# Altium PCB UZ_D_Incr_Encoder.PcbDoc (part 2 of 2)
Units mm, origin at the board's own origin, x right, y up, seen from the top; angles counter-clockwise.
Board outline 155.99 x 100 mm, 2 copper layers (Top Layer, Bottom Layer), stack 0.45 mm thick; 103 components, 109 nets, 501 pads, 172 vias.
Unrouted connection lines stored in the file: 15.
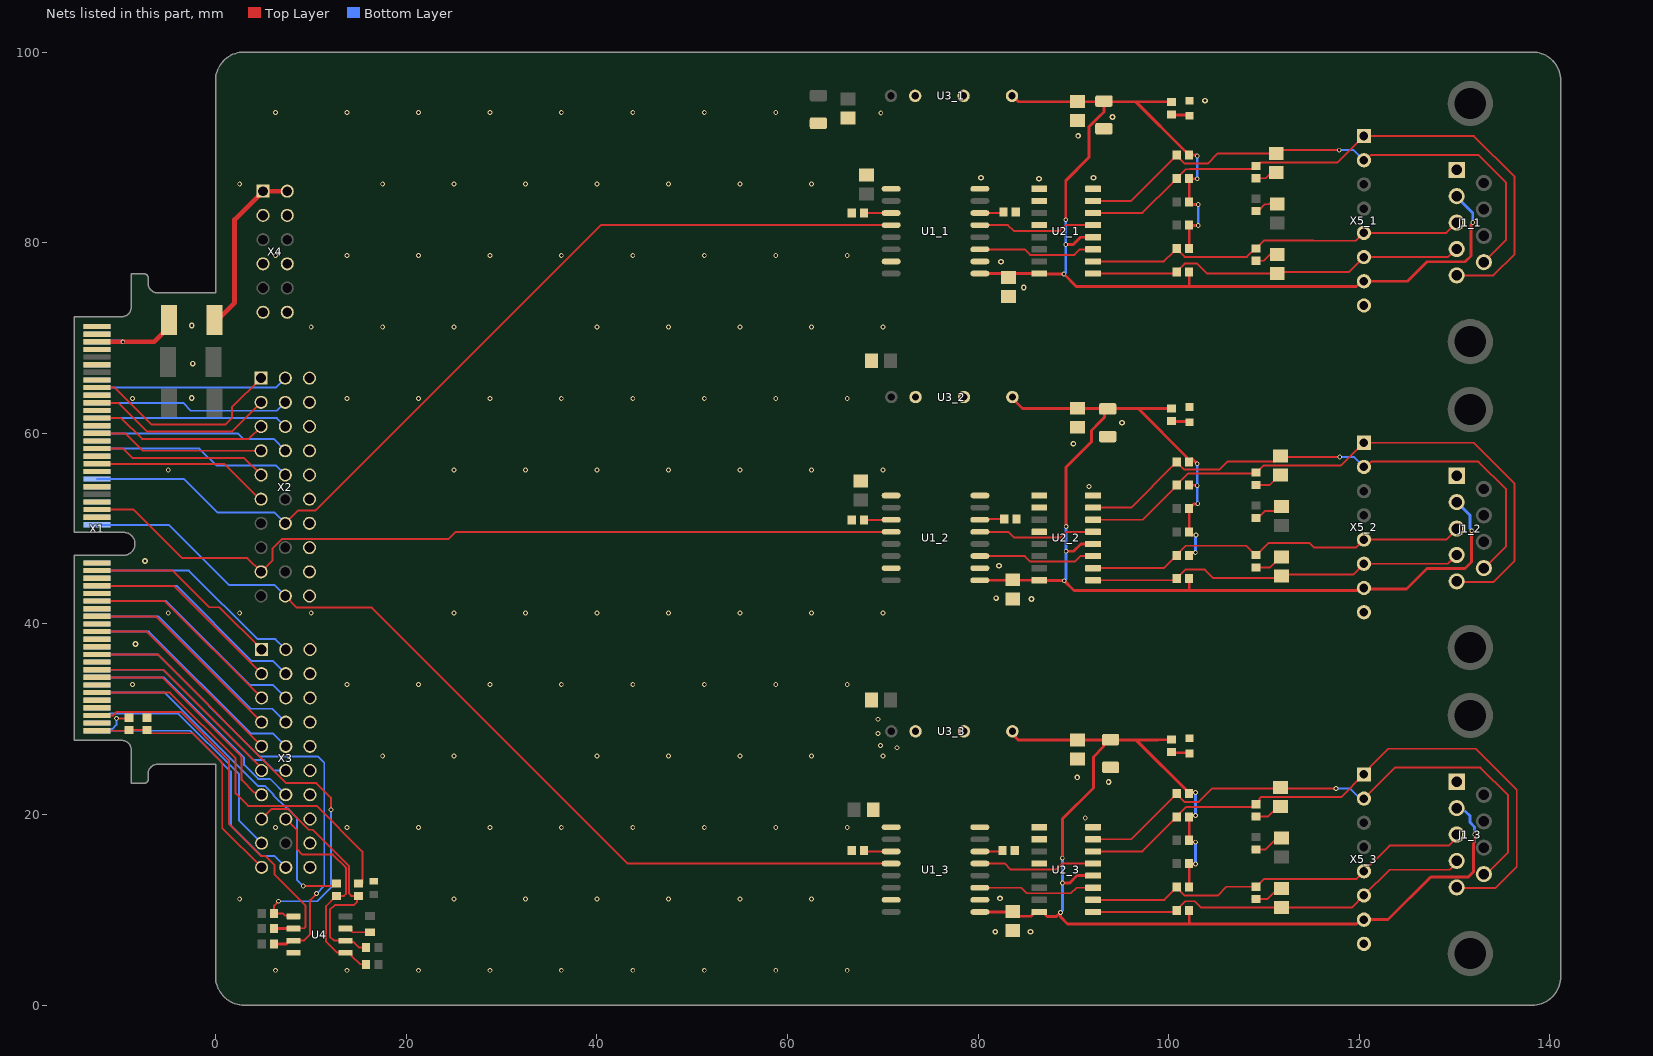
[diagram p2: the nets of this part, all layers, seen from the top]

## Via types
v1: diameter 0.5, hole 0.3, Top Layer to Bottom Layer, tented both sides, 149 vias
v2: diameter 0.6, hole 0.3, Top Layer to Bottom Layer, tented both sides, 23 vias

## Nets (pads, with @x,y where several pads share a name; then routed paths per layer and width w, separated by ;. In a path a pad name is that pad's centre, name@x,y a point inside that pad or via, vN(x,y) a via of type N, cw(c..) or ccw(c..) an arc to the next point about the centre after c; other vN are vias at no path point) (continued)
ADDR_0: R19.1 U4.1 X1.79 | length 49.9
  Top Layer w0.2: X1.79@-12.44,36.791 -6.064,36.791 7.427,23.3 10.572,23.3 12.1,21.772 v1(12.1,20.5) ; v1(6.6,10.9) 6.15,10.45 R19.1@6.15,9.629 7.066,9.629 7.321,9.374 U4.1@7.795,9.374 ; U4.1@7.795,9.305 U4.1@8.175,9.305
  Bottom Layer w0.2: v1(6.6,10.9) 10.666,10.9 12.1,12.334 v1(12.1,20.5)
ADDR_1: R18.1 U4.2 X1.95 | length 40.6
  Top Layer w0.2: X1.95@-12.44,30.391 -10.726,30.391 -10.342,30.775 -3.662,30.775 1.396,25.717 1.396,19.004 4.769,15.631 5.269,15.631 6.2,14.7 6.2,13.7 9.423,10.477 9.423,8.179 9.306,8.062 8.202,8.062 U4.2@8.175,8.035
  Top Layer w0.3: R18.1@6.15,8.029 6.156,8.035 U4.2@8.175,8.035
ADDR_2: R17.1 U4.3 X1.80 | length 51.3
  Top Layer w0.2: U4.3@8.175,6.765 9.265,6.765 9.915,7.415 9.915,11.015 v1(10.6,11.7)
  Top Layer w0.3: R17.1@6.15,6.429 7.414,6.429 7.75,6.765 U4.3@8.175,6.765
  Bottom Layer w0.2: X1.80@-12.44,36.791 -6.064,36.791 4.593,26.134 4.652,26.075 10.748,26.075 11.4,25.423 11.4,12.5 v1(10.6,11.7)
B+_1: J1_1.5 R3_1.1 R7_1.1 U2_1.6 X5_1.1 | length 64.9
  Top Layer w0.2: U2_1.6@91.665,83.109 97.23,83.109 100.475,86.353 100.525,86.353 100.85,86.678 R7_1.1@100.85,86.728 100.85,86.778 101.772,87.7 102.2,87.7 102.225,87.725 108.793,87.725 109.118,88.05 R3_1.1@109.158,88.05 109.168,88.05 109.493,88.375 109.625,88.375 109.65,88.4 117.661,88.4 120.447,91.186 X5_1.1@120.486,91.186 132.014,91.186 136.3,86.9 136.3,78.8 134.06,76.56 J1_1.5@130.22,76.56
B+_2: J1_2.5 R3_2.1 R7_2.1 U2_2.6 X5_2.1 | length 64.5
  Top Layer w0.2: U2_2.6@92.065,50.926 97.277,50.926 100.85,54.499 R7_2.1@100.85,54.549 100.85,54.599 102.035,55.784 109.071,55.784 R3_2.1@109.158,55.871 109.208,55.871 109.964,56.626 118.106,56.626 X5_2.1@120.486,59.007 132.014,59.007 136.3,54.721 136.3,46.621 134.06,44.381 J1_2.5@130.22,44.381
B+_3: J1_3.5 R3_3.1 R7_3.1 U2_3.6 X5_3.1 | length 66.8
  Top Layer w0.2: U2_3.6@91.304,16.13 97.23,16.13 100.475,19.374 100.525,19.374 100.85,19.699 R7_3.1@100.85,19.749 100.85,19.799 101.851,20.8 108.887,20.8 R3_3.1@109.158,21.071 109.183,21.071 109.508,21.396 109.508,21.645 109.683,21.821 118.1,21.821 X5_3.1@120.486,24.207 ; X5_3.1@120.486,24.347 120.627,24.347 121.136,24.857 121.136,24.997 123.039,26.9 132.228,26.9 136.514,22.614 136.514,14.514 134.274,12.274 J1_3.5@130.434,12.274
B-_1: C6_1.2 J1_1.9 R4_1.1 U2_1.7 X5_1.2 | length 57.7
  Top Layer w0.2: U2_1.7@91.665,84.379 96.05,84.379 100.475,88.804 100.525,88.804 R4_1.1@100.85,89.129 ; R4_1.1@100.85,89.179 R4_1.1@100.85,89.129 ; C6_1.2@111.296,89.357 105.157,89.357 104.1,88.3 101.679,88.3 R4_1.1@100.85,89.129 ; C6_1.2@111.328,89.8 111.428,89.7 v1(117.9,89.7) ; X5_1.2@120.486,88.646 120.698,88.646 121.252,89.2 132.5,89.2 135.4,86.3 135.4,80.3 J1_1.9@133.052,77.952
  Bottom Layer w0.2: v1(117.9,89.7) 119.393,89.7 X5_1.2@120.447,88.646
B-_2: C6_2.2 J1_2.9 R4_2.1 U2_2.7 X5_2.2 | length 57.5
  Top Layer w0.2: U2_2.7@92.065,52.196 96.046,52.196 100.475,56.625 100.525,56.625 R4_2.1@100.85,56.95 ; v1(117.94,57.521) 111.85,57.521 C6_2.2@111.744,57.626 111.169,57.051 106.188,57.051 105.328,56.192 101.608,56.192 R4_2.1@100.85,56.95 ; X5_2.2@120.486,56.467 120.72,56.467 121.254,57 ; 121.252,57.021 132.5,57.021 135.4,54.121 135.4,48.121 J1_2.9@133.052,45.773 ; R4_2.1@100.85,56.95 R4_2.1@100.85,57 R4_2.1@100.85,56.95
  Bottom Layer w0.2: v1(117.94,57.521) 119.432,57.521 X5_2.2@120.486,56.467
B-_3: C6_3.2 J1_3.9 R4_3.1 U2_3.7 X5_3.2 | length 59.2
  Top Layer w0.2: U2_3.7@91.304,17.4 96.05,17.4 100.475,21.825 100.525,21.825 R4_3.1@100.85,22.15 ; R4_3.1@100.85,22.2 R4_3.1@100.85,22.15 ; v1(117.54,22.721) 104.521,22.721 103.1,21.3 101.7,21.3 R4_3.1@100.85,22.15 ; X5_3.2@120.505,21.667 X5_3.2@120.486,21.667 123.734,24.914 132.714,24.914 135.614,22.014 135.614,16.014 J1_3.9@133.266,13.666
  Bottom Layer w0.2: v1(117.54,22.721) 119.032,22.721 X5_3.2@120.086,21.667
B_encoder_1: U1_1.12 X1.42 X2.20 | length 98.2
  Top Layer w0.2: X2.20@7.315,50.546 8.669,51.9 10.5,51.9 40.435,81.835 U1_1.12@70.89,81.835
  Bottom Layer w0.2: X1.42@-12.44,55.191 -3.291,55.191 0.2,51.7 6.161,51.7 X2.20@7.315,50.546
B_encoder_2: U1_2.12 X1.49 X2.25 | length 88.5
  Top Layer w0.2: X1.49@-12.44,51.991 -8.591,51.991 -3.5,46.9 3.341,46.9 X2.25@4.775,45.466 5.974,46.665 5.974,47.916 6.949,48.891 24.43,48.891 25.195,49.656 U1_2.12@70.89,49.656
B_encoder_3: U1_3.12 X1.54 X2.29 | length 98
  Top Layer w0.2: X2.29@7.315,42.926 8.541,41.7 16.4,41.7 43.244,14.856 U1_3.12@70.89,14.856
  Bottom Layer w0.2: X1.54@-12.44,50.391 -4.891,50.391 1.4,44.1 6.141,44.1 X2.29@7.315,42.926
B_single_1: U1_1.5 U2_1.5 | length 11.9
  Top Layer w0.2: U1_1.5@80.239,81.839 83.135,81.839 83.75,81.223 88.584,81.223 89.2,81.839 U2_1.5@91.665,81.839
B_single_2: U1_2.5 U2_2.5 | length 11.9
  Top Layer w0.2: U1_2.5@80.278,49.66 83.174,49.66 83.79,49.044 88.624,49.044 89.24,49.66 U2_2.5@91.704,49.66
B_single_3: U1_3.5 U2_3.5 | length 11.9
  Top Layer w0.2: U1_3.5@79.878,14.86 82.774,14.86 83.39,14.244 88.224,14.244 88.84,14.86 U2_3.5@91.304,14.86
Collective_FLT: X1.96 X3.25 | length 25.8
  Bottom Layer w0.2: X1.96@-12.44,30.391 -11.315,30.391 -11.116,30.591 -3.891,30.591 2.445,24.255 2.445,19.373 X3.25@4.826,16.993
CPLD_DigIn_01: X1.83 X3.16 | length 21.8
  Top Layer w0.2: X1.83@-12.44,35.191 -5.491,35.191 4.826,24.874 X3.16@4.826,24.613
CPLD_DigIn_02: X1.85 X3.19 | length 23.8
  Top Layer w0.2: X1.85@-12.44,34.391 -5.611,34.391 2.669,26.111 ; 2.666,26.114 cw(c2.528,25.969) 2.669,26.111 ; X3.19@4.826,22.073 4.602,22.296 4.068,22.296 2.728,23.637 2.728,26.052 2.669,26.111
CPLD_DigOut_01: X1.84 X3.17 | length 24.2
  Bottom Layer w0.2: X1.84@-12.44,35.191 -5.491,35.191 4,25.7 5.061,25.7 6.148,24.613 X3.17@7.366,24.613
CPLD_DigOut_02: X1.86 X3.20 | length 25.4
  Bottom Layer w0.2: X1.86@-12.44,34.391 -5.422,34.391 2.991,25.977 2.991,25.196 4.459,23.728 5.711,23.728 X3.20@7.366,22.073
DIG_IO_00: X1.17 X2.01 | length 21.5
  Top Layer w0.2: X1.17@-12.44,64.791 -10.59,64.791 -6.699,60.9 1.032,60.9 1.723,61.591 1.723,62.734 X2.01@4.775,65.786
DIG_IO_01: X1.18 X2.02 | length 20.2
  Bottom Layer w0.2: X1.18@-12.44,64.791 6.32,64.791 X2.02@7.315,65.786
DIG_IO_02: X1.21 X2.04 | length 19.7
  Top Layer w0.2: X1.21@-12.44,63.191 -10.191,63.191 -7.2,60.2 1.729,60.2 X2.04@4.775,63.246
DIG_IO_03: X1.22 X2.05 | length 20.5
  Bottom Layer w0.2: X1.22@-12.44,63.191 -3.414,63.191 -2.584,62.361 6.43,62.361 X2.05@7.315,63.246
DIG_IO_04: X1.25 X2.07 | length 18.7
  Top Layer w0.2: X1.25@-12.44,61.591 -9.891,61.591 -7.7,59.4 3.469,59.4 X2.07@4.775,60.706
DIG_IO_05: X1.26 X2.08 | length 20.1
  Bottom Layer w0.2: X1.26@-12.44,61.591 6.43,61.591 X2.08@7.315,60.706
DIG_IO_06: X1.29 X2.10 | length 18
  Top Layer w0.2: X1.29@-12.44,59.991 -9.491,59.991 -7.666,58.166 X2.10@4.775,58.166
DIG_IO_07: X1.30 X2.11 | length 20.5
  Bottom Layer w0.2: X1.30@-12.44,59.991 2.309,59.991 2.9,59.4 6.081,59.4 X2.11@7.315,58.166
DIG_IO_08: X1.33 X2.13 | length 18.4
  Top Layer w0.2: X1.33@-12.44,58.391 -9.691,58.391 -8.7,57.4 3.001,57.4 X2.13@4.775,55.626
DIG_IO_09: X1.34 X2.14 | length 20.9
  Bottom Layer w0.2: X1.34@-12.44,58.391 -1.691,58.391 0.1,56.6 6.341,56.6 X2.14@7.315,55.626
DIG_IO_10: X1.37 X2.16 | length 18.7
  Top Layer w0.2: X1.37@-12.44,56.791 0.909,56.791 4.614,53.086 X2.16@4.775,53.086
DIG_IO_20: X1.57 X3.01 | length 20.7
  Top Layer w0.2: X1.57@-12.44,45.591 -4.515,45.591 -0.669,41.744 0.394,41.744 X3.01@4.826,37.313
DIG_IO_21: X1.58 X3.02 | length 23.2
  Bottom Layer w0.2: X1.58@-12.44,45.591 -2.791,45.591 4.4,38.4 6.279,38.4 X3.02@7.366,37.313
DIG_IO_22: X1.61 X3.04 | length 21.1
  Top Layer w0.2: X1.61@-12.44,43.991 -4.392,43.991 X3.04@4.826,34.773
DIG_IO_23: X1.62 X3.05 | length 23.6
  Bottom Layer w0.2: X1.62@-12.44,43.991 -4.091,43.991 3.8,36.1 6.039,36.1 X3.05@7.366,34.773
DIG_IO_24: X1.65 X3.07 | length 21.5
  Top Layer w0.2: X1.65@-12.44,42.391 -5.332,42.391 X3.07@4.826,32.233
DIG_IO_25: X1.66 X3.08 | length 24
  Bottom Layer w0.2: X1.66@-12.44,42.391 -5.191,42.391 3.6,33.6 5.999,33.6 X3.08@7.366,32.233
DIG_IO_26: X1.69 X3.10 | length 21.9
  Top Layer w0.2: X1.69@-12.44,40.791 -6.272,40.791 X3.10@4.826,29.693
DIG_IO_27: X1.70 X3.11 | length 24.4
  Bottom Layer w0.2: X1.70@-12.44,40.791 -5.991,40.791 3.7,31.1 5.959,31.1 X3.11@7.366,29.693
DIG_IO_28: X1.73 X3.13 | length 22.3
  Top Layer w0.2: X1.73@-12.44,39.191 -7.212,39.191 X3.13@4.826,27.153
DIG_IO_29: X1.74 X3.14 | length 24.8
  Bottom Layer w0.2: X1.74@-12.44,39.191 -6.991,39.191 3.7,28.5 6.019,28.5 X3.14@7.366,27.153
DIG_Res_00: X1.78
DIG_Res_03: X1.91
DIG_Res_04: X1.92
DIG_Res_05: X1.93
DIG_Res_06: X1.94
DIG_Res_08: X1.77
GND: C2_1.1 C2_2.1 C2_3.1 C8_1.1 C8_2.1 C8_3.1 C9.1 C10.2 R5.1 R14_1.2 R14_2.2 R14_3.2 U1_1.9 U1_1.15 U1_2.9 U1_2.15 U1_3.9 U1_3.15 U3_1.2 U3_2.2 U3_3.2 U4.4 X1.1 X1.2 X1.3 X1.4 X1.7 X1.8 X1.11 X1.12 X1.15 X1.16 X1.19 X1.20 X1.23 X1.24 X1.27 X1.28 X1.31 X1.32 X1.35 X1.36 X1.39 X1.40 X1.43 X1.44 X1.47 X1.48 X1.51 X1.52 X1.55 X1.56 X1.59 X1.60 X1.63 X1.64 X1.67 X1.68 X1.71 X1.72 X1.75 X1.76 X1.81 X1.82 X1.87 X1.88 X1.97 X1.98 X2.03 X2.06 X2.09 X2.12 X2.15 X2.18 X2.21 X2.24 X2.27 X2.30 X3.03 X3.06 X3.09 X3.12 X3.15 X3.18 X3.21 X3.24 X3.27 X3.30 X4.03 X4.04 X4.07 X4.08 X4.11 X4.12
  other v1: 6.279,3.647 13.779,3.647 21.279,3.647 28.779,3.647 36.279,3.647 43.779,3.647 51.279,3.647 58.779,3.647 66.279,3.647 2.529,11.147 25.029,11.147 32.529,11.147 40.029,11.147 47.529,11.147 55.029,11.147 62.529,11.147 6.279,18.647 13.779,18.647 21.279,18.647 28.779,18.647 36.279,18.647 43.779,18.647 51.279,18.647 58.779,18.647 66.279,18.647 17.529,26.147 25.029,26.147 40.029,26.147 47.529,26.147 55.029,26.147 62.529,26.147 70.029,26.147 71.5,27 69.752,27.232 69.5,28.5 69.5,30 -8.721,33.647 13.779,33.647 21.279,33.647 28.779,33.647 36.279,33.647 43.779,33.647 51.279,33.647 58.779,33.647 66.279,33.647 -4.971,41.147 2.529,41.147 10.029,41.147 25.029,41.147 32.529,41.147 40.029,41.147 47.529,41.147 55.029,41.147 62.529,41.147 70.029,41.147 -4.971,56.147 25.029,56.147 32.529,56.147 40.029,56.147 47.529,56.147 55.029,56.147 62.529,56.147 70.029,56.147 -8.721,63.647 13.779,63.647 21.279,63.647 28.779,63.647 36.279,63.647 43.779,63.647 51.279,63.647 58.779,63.647 66.279,63.647 10.029,71.147 17.529,71.147 25.029,71.147 40.029,71.147 47.529,71.147 55.029,71.147 62.529,71.147 70.029,71.147 6.279,78.647 13.779,78.647 21.279,78.647 28.779,78.647 36.279,78.647 43.779,78.647 51.279,78.647 58.779,78.647 66.279,78.647 2.529,86.147 17.529,86.147 25.029,86.147 32.529,86.147 40.029,86.147 47.529,86.147 55.029,86.147 62.529,86.147 69.8,93.6 6.279,93.647 13.779,93.647 21.279,93.647 28.779,93.647 36.279,93.647 43.779,93.647 51.279,93.647 58.779,93.647
  other v2: -8.4,37.9 -7.4,46.6 -2.5,63.7 -2.4,67.3 -2.5,71.3
GND_ENC_1: C1_1.1 C5_1.1 C7_1.1 D1_1.1 J1_1.1 R13_1.1 U1_1.2 U1_1.8 U2_1.8 U2_1.9 U2_1.10 U2_1.12 U3_1.4 X5_1.8
  other v2: 84.8,75.3 82.4,78 86.4,86.7 80.3,86.8 92.1,86.8 90.5,91.2 94.1,93.179 103.8,94.9
GND_ENC_2: C1_2.1 C5_2.1 C7_2.1 D1_2.1 J1_2.1 R13_2.1 U1_2.2 U1_2.8 U2_2.8 U2_2.9 U2_2.10 U2_2.12 U3_2.4 X5_2.8
  other v1: 91.64,54.421
  other v2: 85.6,42.6 81.9,42.7 82.2,46.1 90,58.9 95.1,61.1
GND_ENC_3: C1_3.1 C5_3.1 C7_3.1 D1_3.1 J1_3.1 R13_3.1 U1_3.2 U1_3.8 U2_3.8 U2_3.9 U2_3.10 U2_3.12 U3_3.4 X5_3.8
  other v1: 91.24,19.621
  other v2: 81.8,7.7 85.5,7.7 82.3,11.2 93.7,23.4 90.4,23.9
NetC3_1_1: C3_1.1 R1_1.2 | length 2.7
  Top Layer w0.2: R1_1.2@109.118,78.099 109.98,78.099 111.228,79.348 C3_1.1@111.328,79.348
NetC3_2_1: C3_2.1 R1_2.2 | length 3.1
  Top Layer w0.2: R1_2.2@109.158,45.92 110.638,45.92 111.744,47.026 C3_2.1@111.844,47.026
NetC3_3_1: C3_3.1 R1_3.2 | length 3
  Top Layer w0.2: R1_3.2@108.758,11.12 110.347,11.12 111.276,12.05 C3_3.1@111.376,12.05
NetC4_1_1: C4_1.1 R2_1.2 | length 2.2
  Top Layer w0.2: R2_1.2@109.322,83.301 109.372,83.301 110.095,84.025 110.482,84.025 C4_1.1@111.007,84.55
NetC4_2_1: C4_2.1 R2_2.2 | length 3
  Top Layer w0.2: R2_2.2@109.361,51.122 109.411,51.122 110.135,51.846 111.364,51.846 C4_2.1@111.844,52.326
NetC4_3_1: C4_3.1 R2_3.2 | length 3.7
  Top Layer w0.2: R2_3.2@108.758,16.322 R2_3.2@108.961,16.322 ; R2_3.2@109.416,16.34 108.979,16.34 R2_3.2@108.961,16.322 ; C4_3.1@111.476,17.55 111.376,17.55 110.149,16.322 R2_3.2@108.961,16.322
NetC6_1_1: C6_1.1 R3_1.2 | length 2.6
  Top Layer w0.2: R3_1.2@109.118,86.75 110.178,86.75 111.228,87.8 C6_1.1@111.328,87.8
NetC6_2_1: C6_2.1 R3_2.2 | length 3
  Top Layer w0.2: R3_2.2@109.158,54.571 110.589,54.571 111.644,55.626 C6_2.1@111.744,55.626
NetC6_3_1: C6_3.1 R3_3.2 | length 3.4
  Top Layer w0.2: R3_3.2@108.758,19.771 110.392,19.771 111.545,20.925 C6_3.1@111.645,20.925
NetD1_1_2: D1_1.2 R12_1.1 | length 1.9
  Top Layer w0.3: R12_1.1@100.3,93.45 100.375,93.375 102.103,93.375 D1_1.2@102.178,93.3
NetD1_2_2: D1_2.2 R12_2.1 | length 1.9
  Top Layer w0.3: R12_2.1@100.3,61.3 100.375,61.225 102.103,61.225 D1_2.2@102.178,61.15
NetD1_3_2: D1_3.2 R12_3.1 | length 1.9
  Top Layer w0.3: R12_3.1@100.3,26.55 100.375,26.475 102.103,26.475 D1_3.2@102.178,26.4
NetR13_1_2: R13_1.2 U1_1.6 | length 2.6
  Top Layer w0.2: U1_1.6@80.19,83.105 R13_1.2@82.655,83.105
  Top Layer w0.3: R13_1.2@82.655,83.105 R13_1.2@82.75,83.2
NetR13_2_2: R13_2.2 U1_2.6 | length 2.6
  Top Layer w0.2: U1_2.6@80.19,50.926 80.917,50.926 80.991,51 R13_2.2@82.75,51
NetR13_3_2: R13_3.2 U1_3.6 | length 2.4
  Top Layer w0.2: U1_3.6@80.19,16.126 82.476,16.126 R13_3.2@82.55,16.2
NetR14_1_1: R14_1.1 U1_1.11 | length 2.8
  Top Layer w0.2: R14_1.1@68.055,83.105 U1_1.11@70.89,83.105
  Top Layer w0.3: R14_1.1@68.05,83.1 R14_1.1@68.055,83.105
NetR14_2_1: R14_2.1 U1_2.11 | length 2.9
  Top Layer w0.2: R14_2.1@68.05,50.9 68.063,50.913 70.877,50.913 U1_2.11@70.89,50.926
NetR14_3_1: R14_3.1 U1_3.11 | length 2.9
  Top Layer w0.2: R14_3.1@68.05,16.2 68.124,16.126 U1_3.11@70.89,16.126
NetR15_2: R15.2 X1.89 | length 40.3
  Top Layer w0.2: X1.89@-12.44,32.791 -4.791,32.791 2.1,25.9 2.1,22.219 3.419,20.9 10.6,20.9 15.4,16.1 R15.2@15.4,12.75
NetR16_1: R16.1 X1.90 | length 37.5
  Top Layer w0.2: v1@9.206,12.496 12.446,12.496 R16.1@12.7,12.75
  Bottom Layer w0.2: X1.90@-12.44,32.791 -5.357,32.791 4.426,23.008 5.185,23.008 6.068,22.125 6.068,22.02 7.453,20.635 7.558,20.635 8.565,19.628 8.565,13.124 v1(9.193,12.496)
NetSB1_2: SB1.2 U4.7 | length 2.8
  Top Layer w0.2: U4.7@13.625,8.035 14.05,8.035 14.25,7.835 14.25,7.76 14.367,7.643 SB1.2@16.2,7.643
PILOT_IN: R6.2 X1.100 X3.29 | length 33.3
  Top Layer w0.2: v1(-10.391,30.091) -9.16,30.091 R6.2@-9.1,30.15
  Bottom Layer w0.2: v1(-10.391,30.091) -10.4,30.081 -10.4,29.4 -10.834,28.966 -12.265,28.966 X1.100@-12.44,28.791 -2.668,28.791 0.6,25.523 0.6,25.499 1.6,24.499 1.6,18.896 4.865,15.631 6.187,15.631 X3.29@7.366,14.453
PILOT_OUT: R5.2 R6.1 X1.99 X3.28 | length 27.3
  Top Layer w0.2: X1.99@-12.44,28.791 -9.159,28.791 R6.1@-9.1,28.85 R5.2@-7.2,28.85 -6.875,28.525 -2.402,28.525 0.7,25.423 0.7,18.579 X3.28@4.826,14.453
PS_I2C0_SCL: R15.1 R21.1 U4.6 X3.22 | length 27
  Top Layer w0.2: X3.22@4.826,19.533 5.855,20.562 7.625,20.562 9.787,18.4 10.174,18.4 14,14.574 14,11.683 14.225,11.458 R15.1@14.981,11.458 ; R15.1@14.981,11.45 14.842,11.311 14.842,10.85 14.492,10.5 12.503,10.5 12,9.997 12,7.193 12.428,6.765 U4.6@13.625,6.765 13.78,6.61 14.49,6.61 15.075,6.025 R21.1@15.775,6.025
PS_I2C0_SDA: R16.2 R20.1 U4.5 X3.23 | length 24
  Top Layer w0.2: X3.23@7.366,19.533 8.565,18.334 8.565,16.335 9.1,15.8 12.3,15.8 13.65,14.45 13.7,14.45 13.7,11.696 13.454,11.45 12.65,11.45 11.6,10.4 11.6,6.654 12.717,5.537 13.583,5.537 U4.5@13.625,5.495 14.05,5.495 14.25,5.295 14.25,5.204 15.167,4.287 15.767,4.287 R20.1@15.775,4.279
VCC_ENC_1: C1_1.2 C5_1.2 C7_1.2 J1_1.2 R4_1.2 R7_1.2 R8_1.2 R9_1.2 R10_1.2 R11_1.2 R12_1.2 U1_1.1 U2_1.4 U2_1.16 U3_1.6 X5_1.7 | length 123
  Top Layer w0.3: U1_1.1@80.15,76.755 86.75,76.755 86.786,76.719 88.981,76.719 v1(89,76.7) 90.3,75.4 102.092,75.4 ; U3_1.6@83.56,95.4 83.615,95.4 84.237,94.778 90.444,94.778 C5_1.2@93.2,94.778 ; v1(89.2,79.8) 89.985,79.8 90.75,80.565 U2_1.4@91.65,80.565 ; v1(89.2,82.4) 89.2,86.5 91.65,88.95 91.65,92.152 92.598,93.1 92.6,93.1 93.2,93.7 C5_1.2@93.2,94.778 ; R12_1.2@100.3,94.75 100.272,94.778 96.551,94.778 ; R11_1.2@102.15,76.925 102.15,75.458 102.092,75.4 ; R10_1.2@102.15,79.376 R9_1.2@102.15,81.827 102.177,81.8 v1(103.1,81.8) ; v1(103,86.7) 102.178,86.7 R7_1.2@102.15,86.728 R8_1.2@102.15,84.277 102.15,84.275 102.425,84 v1(103.1,84) ; v1(103,89.1) 102.921,89.179 R4_1.2@102.15,89.179 102.15,89.229 101.875,89.504 101.825,89.504 96.551,94.778 ; v1(131.9,82.1) 131.9,82.046 131.7,81.846 131.7,78.6 131.1,78 127.1,78 125.046,75.946 X5_1.7@120.486,75.946 120.257,75.946 119.711,75.4 102.092,75.4 ; C5_1.2@93.2,94.778 C5_1.2@93.2,94.85 93.272,94.778 96.551,94.778
  Bottom Layer w0.3: v1(89,76.7) 89.2,76.9 v1(89.2,79.8) v1(89.2,82.4) ; v1(103,86.7) v1(103,89.1) ; v1(103.1,81.8) v1(103.1,84) ; J1_1.2@130.22,84.87 130.22,84.774 131.9,83.094 v1(131.9,82.1)
VCC_ENC_2: C1_2.2 C5_2.2 C7_2.2 J1_2.2 R4_2.2 R7_2.2 R8_2.2 R9_2.2 R10_2.2 R11_2.2 R12_2.2 U1_2.1 U2_2.4 U2_2.16 U3_2.6 X5_2.7 | length 122.5
  Top Layer w0.3: U1_2.1@80.19,44.576 83.594,44.576 C1_2.2@83.644,44.626 83.695,44.576 U2_2.16@86.415,44.576 86.79,44.576 86.825,44.54 89.02,44.54 v1(89.04,44.521) 90.06,43.5 102.158,43.5 102.15,43.508 R11_2.2@102.15,44.746 ; U3_2.6@83.725,63.529 84.654,62.599 C5_2.2@93.771,62.599 ; v1(89.24,47.621) 90.025,47.621 90.79,48.386 U2_2.4@91.69,48.386 ; v1(89.24,50.221) 89.24,56.44 91.9,59.1 91.9,60.3 92.8,61.2 93.271,61.671 93.271,62.099 C5_2.2@93.771,62.599 ; R12_2.2@100.3,62.6 100.299,62.599 96.801,62.599 ; 102.15,43.513 119.711,43.513 119.735,43.537 120.257,43.537 X5_2.7@120.486,43.767 ; R10_2.2@102.15,47.197 102.15,47.225 102.425,47.5 v1(102.797,47.5) ; R7_2.2@102.15,54.549 102.924,54.549 102.973,54.5 v1(103,54.5) ; R4_2.2@102.15,57 101.875,57.275 101.875,57.525 96.801,62.599 ; R4_2.2@102.45,57.35 v1(103,56.8) ; v1(102.878,49.322) 102.425,49.322 102.15,49.597 R9_2.2@102.15,49.647 R8_2.2@102.15,52.098 102.15,52.148 102.425,52.423 102.475,52.423 102.647,52.595 103.027,52.595 v1(103.046,52.615) ; X5_2.7@120.486,43.655 124.934,43.655 127.1,45.821 131.1,45.821 131.779,46.5 v1@131.779,49.767 ; C5_2.2@93.771,62.599 94.223,62.599 96.801,62.599
  Bottom Layer w0.3: v1(89.04,44.521) 89.24,44.721 v1(89.24,47.621) v1(89.24,50.221) ; v1(102.797,47.5) 102.797,49.215 102.878,49.295 v1(102.878,49.322) ; v1(103,56.8) v1(103,54.5) 103,52.661 v1(103.046,52.615) ; J1_2.2@129.918,53.072 131.6,51.39 131.6,50.021 131.8,49.821 v1(131.8,49.767)
VCC_ENC_3: C1_3.2 C5_3.2 C7_3.2 J1_3.2 R4_3.2 R7_3.2 R8_3.2 R9_3.2 R10_3.2 R11_3.2 R12_3.2 U1_3.1 U2_3.4 U2_3.16 U3_3.6 X5_3.7 | length 124.6
  Top Layer w0.3: U1_3.1@79.79,9.776 C1_3.2@83.644,9.776 ; U3_3.6@83.325,28.729 84.254,27.799 C5_3.2@93.571,27.799 ; C1_3.2@83.644,9.826 84.143,9.328 85.564,9.328 85.74,9.503 85.74,9.601 85.915,9.776 86.915,9.776 87.09,9.601 87.09,9.468 87.265,9.292 88.211,9.292 v1(88.64,9.721) 88.64,9.273 89.394,8.519 102.27,8.519 ; v1(88.84,12.821) 89.625,12.821 90.39,13.586 U2_3.4@91.29,13.586 ; v1(88.84,15.421) 88.84,19.521 92.1,22.781 92.1,26.05 93.171,27.121 93.171,27.399 C5_3.2@93.571,27.799 ; C5_3.2@93.9,27.85 93.622,27.85 C5_3.2@93.571,27.799 ; C5_3.2@94.223,27.799 96.601,27.799 ; R12_3.2@100.3,27.85 98.879,27.85 98.828,27.799 96.601,27.799 ; R11_3.2@102.15,9.946 102.15,8.639 102.27,8.519 ; R10_3.2@102.15,12.397 R9_3.2@102.15,14.847 102.197,14.8 v1(102.8,14.8) ; v1(102.8,17.1) 102.348,17.1 R8_3.2@102.15,17.298 R7_3.2@102.15,19.749 102.301,19.9 v1(102.8,19.9) ; v1(102.8,22.3) 102.25,22.3 R4_3.2@102.15,22.2 102.15,22.25 96.601,27.799 ; v1@132.114,17.886 132.114,17.117 131.965,16.969 131.965,13.996 131.424,13.455 127.503,13.455 123.014,8.967 120.162,8.967 119.714,8.519 102.27,8.519
  Bottom Layer w0.3: v1(88.64,9.721) 88.84,9.921 v1(88.84,12.821) v1(88.84,15.421) ; v1(102.8,14.8) v1(102.8,17.1) ; v1(102.8,19.9) v1(102.8,22.3) ; 131.156,20.325 131.609,19.872 131.609,19.187 132.1,18.696 v1(132.1,17.9)
VIN: F1.1 X1.5 X1.6 | length 11.7
  Top Layer w0.5: X1.5@-12.44,69.591 v1(-9.727,69.591) -6.44,69.591 -4.879,71.152 F1.1@-4.879,71.882
  Bottom Layer w0.5: X1.6@-12.44,69.591 v1(-9.727,69.591)
VIN_fused: F1.2 X4.01 X4.02 | length 19.2
  Top Layer w0.5: F1.2@-0.099,70.882 -0.099,71.612 2,73.711 2,82.416 X4.01@4.978,85.395 X4.02@7.518,85.395
Z+_1: J1_1.3 R1_1.1 R10_1.1 U2_1.2 X5_1.5 | length 41
  Top Layer w0.2: U2_1.2@91.665,78.029 99.503,78.029 100.475,79.001 100.525,79.001 R10_1.1@100.85,79.326 ; R10_1.1@100.85,79.376 R10_1.1@100.85,79.326 ; J1_1.3@130.22,82.1 129.146,81.026 X5_1.5@120.486,81.026 120.447,81.026 119.621,80.2 115.2,80.2 115.177,80.223 109.992,80.223 109.168,79.399 R1_1.1@109.158,79.399 109.108,79.399 108.209,78.5 101.676,78.5 R10_1.1@100.85,79.326
Z+_2: J1_2.3 R1_2.1 R10_2.1 U2_2.2 X5_2.5 | length 41.1
  Top Layer w0.2: U2_2.2@92.065,45.846 99.499,45.846 100.475,46.822 100.525,46.822 100.85,47.147 R10_2.1@100.85,47.197 100.85,47.247 101.803,48.2 108.128,48.2 109.108,47.22 R1_2.1@109.158,47.22 109.208,47.22 110.488,48.5 114.76,48.5 115.24,48.021 119.66,48.021 X5_2.5@120.486,48.847 129.146,48.847 J1_2.3@130.22,49.921
Z+_3: J1_3.3 R1_3.1 R10_3.1 U2_3.2 X5_3.5 | length 41.9
  Top Layer w0.2: U2_3.2@92.065,11.046 99.549,11.046 R10_3.1@100.85,12.347 ; R10_3.1@100.85,12.397 R10_3.1@100.85,12.347 ; J1_3.3@130.434,17.814 129.36,16.74 123.18,16.74 X5_3.5@120.486,14.047 119.66,13.221 109.983,13.221 109.533,12.771 109.533,12.745 109.208,12.42 R1_3.1@109.158,12.42 106.052,12.42 105.131,11.5 101.697,11.5 R10_3.1@100.85,12.347
Z-_1: C3_1.2 J1_1.4 R11_1.1 U2_1.1 X5_1.6 | length 40.5
  Top Layer w0.2: U2_1.1@91.665,76.759 100.684,76.759 R11_1.1@100.85,76.925 100.85,76.975 101.675,77.8 103,77.8 104.043,76.757 C3_1.2@111.396,76.757 111.539,76.9 118.9,76.9 X5_1.6@120.486,78.486 129.271,78.486 130.115,79.33 J1_1.4@130.22,79.33
Z-_2: C3_2.2 J1_2.4 R11_2.1 U2_2.1 X5_2.6 | length 40.6
  Top Layer w0.2: U2_2.1@91.704,44.58 U2_2.1@92.065,44.58 ; U2_2.1@92.065,44.576 100.68,44.576 R11_2.1@100.85,44.746 100.85,44.796 101.754,45.7 103.8,45.7 104.7,44.8 111.618,44.8 C3_2.2@111.844,45.026 111.987,45.169 119.348,45.169 X5_2.6@120.486,46.307 ; X5_2.6@120.656,46.476 X5_2.6@120.486,46.307 ; J1_2.4@130.22,47.151 130.115,47.151 129.271,46.307 X5_2.6@120.486,46.307
Z-_3: C3_3.2 J1_3.4 R11_3.1 U2_3.1 X5_3.6 | length 41.9
  Top Layer w0.2: U2_3.1@91.304,9.78 100.684,9.78 R11_3.1@100.85,9.946 100.85,9.996 101.755,10.901 102.759,10.901 103.434,10.226 C3_3.2@111.844,10.226 119.206,10.226 X5_3.6@120.486,11.507 123.18,14.2 129.485,14.2 130.329,15.044 J1_3.4@130.434,15.044
Z_single_1: U1_1.3 U2_1.3 | length 11.9
  Top Layer w0.2: U1_1.3@80.239,79.299 84.874,79.299 85.458,78.715 90.107,78.715 90.691,79.299 U2_1.3@91.665,79.299
Z_single_2: U1_2.3 U2_2.3 | length 11.9
  Top Layer w0.2: U1_2.3@80.278,47.12 84.914,47.12 85.498,46.535 90.147,46.535 90.731,47.12 U2_2.3@91.704,47.12
Z_single_3: U1_3.3 U2_3.3 | length 11.9
  Top Layer w0.2: U1_3.3@79.878,12.32 84.514,12.32 85.098,11.735 89.747,11.735 90.331,12.32 U2_3.3@91.304,12.32
pads on no net: J1_1.6 J1_1.10 J1_1.11 J1_2.6 J1_2.10 J1_2.11 J1_3.6 J1_3.10 J1_3.11 U1_1.7 U1_2.7 U1_3.7 U2_1.11 U2_2.11 U2_3.11 X3.26

## Polygon pours and split planes (outlines as drawn)
GND on Top Layer "GND_L01_P000" (solid, remove dead copper, pour order 0): 3,100 72.1,100 72.1,0.127 2.286,0.127 0,2.413 0,25.275 -6.526,25.275 -7.073,24.728 -7.073,23.679 -7.06,23.666 -7.46,23.266 -8.831,23.266 -8.853,23.288 -8.853,27.168 -9.451,27.766 -14.831,27.766 -14.84,27.775 -14.84,47.191 -9.095,47.191 -8.407,47.879 -8.407,48.827 -9.181,49.6 -11.841,49.6 -11.85,49.591 -11.859,49.6 -14.84,49.6 -14.84,72.225 -14.827,72.238 -9.861,72.238 -9.849,72.225 -9.411,72.225 -8.84,72.796 -8.84,76.712 -8.777,76.649 -7.238,76.649 -7.238,75.89 -6.635,75.287 -6.635,74.898 -4.946,74.898 -4.773,74.725 -0.02,74.725 -0.02,98.177 1.804,100
GND on Top Layer "GND_L01_P011" (solid, pour order 11): 69.302,65.532 74.202,65.532 74.202,62.032 69.302,62.032
GND on Top Layer "GND_L01_P013" (solid, pour order 13): 69.302,97.704 74.202,97.704 74.202,94.204 69.302,94.204
GND_ENC_1 on Top Layer "GND_ENC_1_TOP" (solid, remove dead copper, pour order 8): 77.5,97.063 77.5,71.5 139.659,71.5 139.659,97.001
GND on Top Layer "GND_L01_P014" (solid, pour order 14): 69.302,30.504 74.202,30.504 74.202,27.004 69.302,27.004
GND_ENC_3 on Top Layer "GND_ENC_3_TOP" (solid, remove dead copper, pour order 4): 77.5,30 77.5,4.5 139.659,4.5 139.659,30
GND_ENC_2 on Top Layer "GND_ENC_2_TOP" (solid, remove dead copper, pour order 3): 77.5,65 77.5,39.5 139.659,39.5 139.659,65
GND on Bottom Layer "GND_L02_P017" (solid, pour order 17): 69.276,97.646 74.176,97.646 74.176,94.146 69.276,94.146
GND on Bottom Layer "GND_L02_P016" (solid, pour order 16): 69.302,65.532 74.202,65.532 74.202,62.032 69.302,62.032
GND on Bottom Layer "GND_L02_P006" (solid, remove dead copper, pour order 6): 2.822,100.152 72.108,100.152 72.083,0.279 2.108,0.279 -0.178,2.565 -0.178,25.427 -6.704,25.427 -7.251,24.88 -7.251,23.831 -7.238,23.818 -7.638,23.418 -9.009,23.418 -9.031,23.44 -9.031,27.321 -9.628,27.918 -15.009,27.918 -15.018,27.927 -15.018,47.343 -9.273,47.343 -8.585,48.031 -8.585,48.979 -9.359,49.752 -12.019,49.752 -12.028,49.743 -12.037,49.752 -15.018,49.752 -15.018,72.377 -15.005,72.39 -10.039,72.39 -10.027,72.377 -9.588,72.377 -9.018,72.948 -9.018,76.864 -8.955,76.801 -7.416,76.801 -7.416,76.043 -6.813,75.439 -6.813,75.05 -5.124,75.05 -4.951,74.877 -0.198,74.877 -0.198,98.329 1.626,100.152
GND on Bottom Layer "GND_L02_P015" (solid, pour order 15): 69.333,30.42 74.233,30.42 74.233,26.92 69.333,26.92
GND_ENC_1 on Bottom Layer "GND_ENC_1_TOP" (solid, remove dead copper, pour order 12): 77.5,97.063 77.5,71.5 139.659,71.5 139.659,97.001
GND_ENC_2 on Bottom Layer "GND_ENC_2_BOTTOM" (solid, remove dead copper, pour order 9): 77.5,65 77.5,39.5 139.576,39.5 139.576,65
GND_ENC_3 on Bottom Layer "GND_ENC_3_BOTTOM" (solid, remove dead copper, pour order 7): 77.5,30 77.5,4.5 139.576,4.5 139.576,30

## Keep-outs
Keep-Out Layer:
  rectangle: 0,97.1 142,100.1
  rectangle: 0,0 142,3

## Silkscreen, mask and mechanical layers (free items; w line width, h text height)
Top Overlay:
  text "B+" at 122.754,90.636 h1.1
  text "B-" at 122.754,88.096 h1.1
  text "A+" at 122.754,85.556 h1.1
  text "VIN" at 9.164,84.642 h1.1
  text "A-" at 122.754,83.016 h1.1
  text "GND" at 9.167,82.102 h1.1
  text "Z+" at 122.754,80.476 h1.1
  text "5V_PER" at 9.167,79.862 h1.1
  text "Z-" at 122.754,77.936 h1.1
  text "GND" at 9.167,77.022 h1.1
  text "5V" at 122.754,75.396 h1.1
  text "3V3_PER" at 9.167,74.882 h1.1
  text "GND" at 122.754,72.856 h1.1
  text "GND" at 9.167,72.069 h1.1
  text "GND" at 19,65.492 h1.52
  text "D00" at 11.6,65.316 h1.52
  text "D01" at 15.5,65.316 h1.52
  text "GND" at 19,62.906 h1.52
  text "D02" at 11.6,62.746 h1.52
  text "D03" at 15.5,62.745 h1.52
  text "GND" at 19,60.32 h1.52
  text "D04" at 11.6,60.175 h1.52
  text "D05" at 15.5,60.175 h1.52
  text "B+" at 122.794,58.457 h1.1
  text "GND" at 19,57.733 h1.52
  text "D06" at 11.6,57.605 h1.52
  text "D07" at 15.5,57.605 h1.52
  text "B-" at 122.794,55.917 h1.1
  text "GND" at 19,55.147 h1.52
  text "D08" at 11.6,55.035 h1.52
  text "D09" at 15.5,55.035 h1.52
  text "A+" at 122.794,53.377 h1.1
  text "GND" at 19,52.561 h1.52
  text "D11" at 15.5,52.481 h1.52
  text "D10" at 11.6,52.465 h1.52
  text "A-" at 122.794,50.837 h1.1
  text "GND" at 19,49.975 h1.52
  text "D12" at 11.6,49.911 h1.52
  text "D13" at 15.5,49.91 h1.52
  text "Z+" at 122.794,48.297 h1.1
  text "GND" at 19,47.388 h1.52
  text "D14" at 11.6,47.356 h1.52
  text "D15" at 15.5,47.34 h1.52
  text "Z-" at 122.794,45.757 h1.1
  text "D16" at 11.6,44.786 h1.52
  text "D17" at 15.5,44.786 h1.52
  text "GND" at 19,44.802 h1.52
  text "5V" at 122.794,43.217 h1.1
  text "D18" at 11.6,42.216 h1.52
  text "D19" at 15.5,42.216 h1.52
  text "GND" at 19,42.216 h1.52
  text "GND" at 122.794,40.677 h1.1
  text "D20" at 11.6,37.012 h1.52
  text "D21" at 15.6,36.996 h1.52
  text "GND" at 19,36.982 h1.52
  text "D22" at 11.6,34.421 h1.52
  text "D23" at 15.6,34.396 h1.52
  text "GND" at 19,34.391 h1.52
  text "D24" at 11.6,31.83 h1.52
  text "D25" at 15.6,31.798 h1.52
  text "GND" at 19,31.799 h1.52
  text "D26" at 11.6,29.223 h1.52
  text "D27" at 15.6,29.215 h1.52
  text "GND" at 19,29.207 h1.52
  text "D28" at 11.6,26.616 h1.52
  text "D29" at 15.6,26.616 h1.52
  text "GND" at 19,26.616 h1.52
  text "CPLD_IN01" at 11.6,24.234 h1.52
  text "OUT01" at 20.4,24.234 h1.52
  text "GND" at 25.9,24.234 h1.52
  text "B+" at 122.394,23.657 h1.1
  text "GND" at 26,21.668 h1.52
  text "CPLD_IN02" at 11.6,21.6 h1.52
  text "OUT02" at 20.4,21.6 h1.52
  text "B-" at 122.394,21.117 h1.1
  text "GND" at 26,19.102 h1.52
  text "I2C0_SCL" at 11.6,18.966 h1.52
  text "SCA" at 20.4,18.966 h1.52
  text "A+" at 122.394,18.577 h1.1
  text "FAULT" at 11.6,16.604 h1.52
  text "GND" at 26,16.536 h1.52
  text "A-" at 122.394,16.037 h1.1
  text "PIL_OUT" at 11.6,13.971 h1.52
  text "IN" at 20.4,13.987 h1.52
  text "GND" at 26,13.971 h1.52
  text "Z+" at 122.394,13.497 h1.1
  text "JLCJLCJLCJLC" at 140.44,13.36 h0.81 r90
  text "Z-" at 122.394,10.957 h1.1
  text "5V" at 122.394,8.417 h1.1
  text "GND" at 122.394,5.877 h1.1
Mechanical 1:
  lines w0.1: -14.853,27.775 -14.853,47.2 -9.653,47.2 ccw(c-9.653,48.4) -9.653,49.6 -14.853,49.6 -14.853,72.225 -9.853,72.225 ccw(c-9.853,73.225) -8.853,73.225 -8.853,76.725 -7.473,76.725 cw(c-7.473,76.325) -7.073,76.325 -7.073,75.725 ccw(c-6.073,75.725) -6.073,74.725 0,74.725 0,97 cw(c3,97) 3,100 138.141,100 cw(c138.141,97) 141.141,97 141.141,3 cw(c138.141,3) 138.141,0 3,0 cw(c3,3) 0,3 0,25.275 -6.073,25.275 ccw(c-6.073,24.275) -7.073,24.275 -7.073,23.675 cw(c-7.473,23.675) -7.473,23.275 -8.853,23.275 -8.853,26.775 ccw(c-9.853,26.775) -9.853,27.775 -14.853,27.775
Top Designator:
  text "C6_1" at 112.818,88.337 h1.1
  text "C2_1" at 61.453,85.637 h1.1
  text "C4_1" at 112.818,82.687 h1.1
  text "C3_1" at 112.818,77.485 h1.1
  text "C1_1" at 84.453,72.137 h1.1

## Dimensions
147.14,33.3 to 147.14,34.59 on Mechanical 2
147.14,66.69 to 147.14,65.4 on Mechanical 2
145.1,98 to -14.853,72.225 on Mechanical 2
141.141,0 to 141.141,100 on Mechanical 2
146.143,97.802 to -14.84,72.216 on Mechanical 2
141.141,100 to -14.853,72.225 on Mechanical 2
141.141,100 to 0.031,100 on Mechanical 2

## Text inside footprints (layer, text, board x,y; h text height)
J1_1: Top Overlay "1" at 126.765,87.89 h1.1 r270; Top Overlay "5" at 126.765,77.06 h1.1 r270; Top Overlay "9" at 136.165,78.445 h1.1 r270; Top Overlay "6" at 136.165,86.755 h1.1 r270
J1_2: Top Overlay "1" at 126.765,55.79 h1.1 r270; Top Overlay "5" at 126.765,44.96 h1.1 r270; Top Overlay "9" at 136.165,46.345 h1.1 r270; Top Overlay "6" at 136.165,54.655 h1.1 r270
J1_3: Top Overlay "6" at 136.165,22.555 h1.5 r270; Top Overlay "9" at 136.165,14.245 h1.5 r270; Top Overlay "5" at 126.765,12.86 h1.5 r270; Top Overlay "1" at 126.765,23.69 h1.5 r270